# Altium PCB PCB1.PcbDoc
Units mm, origin at the board's own origin, x right, y up, seen from the top; angles counter-clockwise.
Board outline 112.01 x 64.26 mm, 2 copper layers (Top Layer, Bottom Layer); 66 components, 35 nets, 197 pads, 28 vias.
Unrouted connection lines stored in the file: 61.
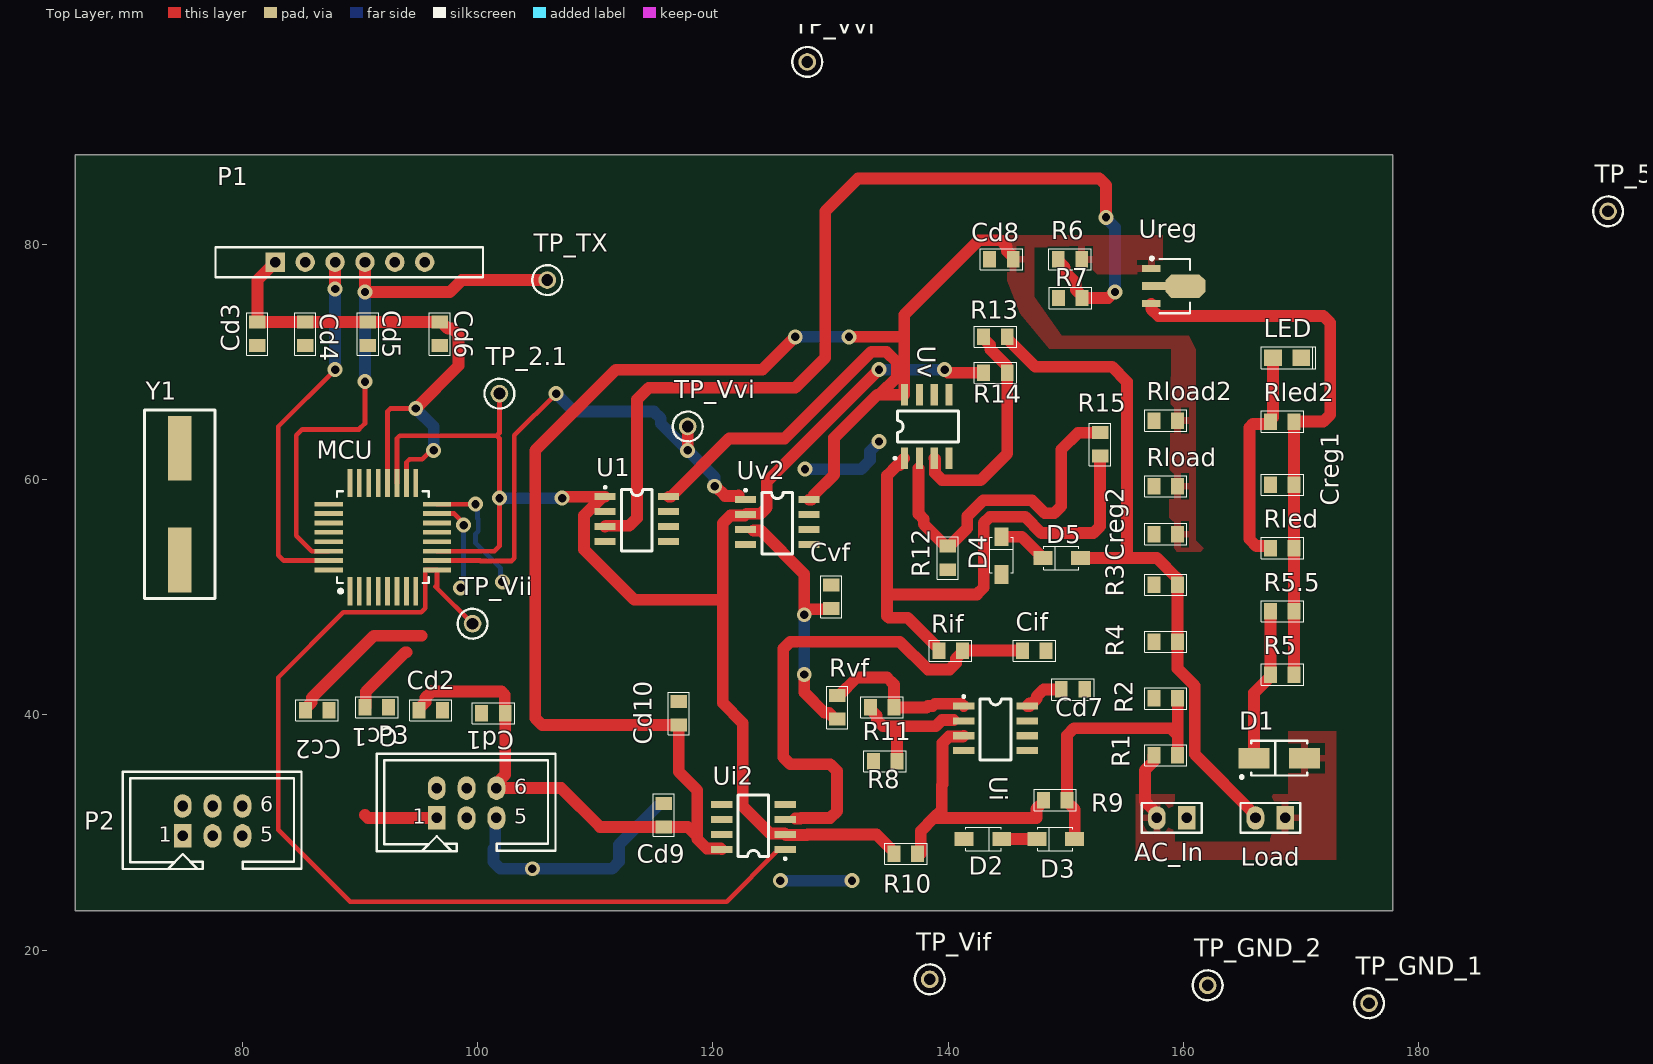
[diagram p0: Top Layer view]
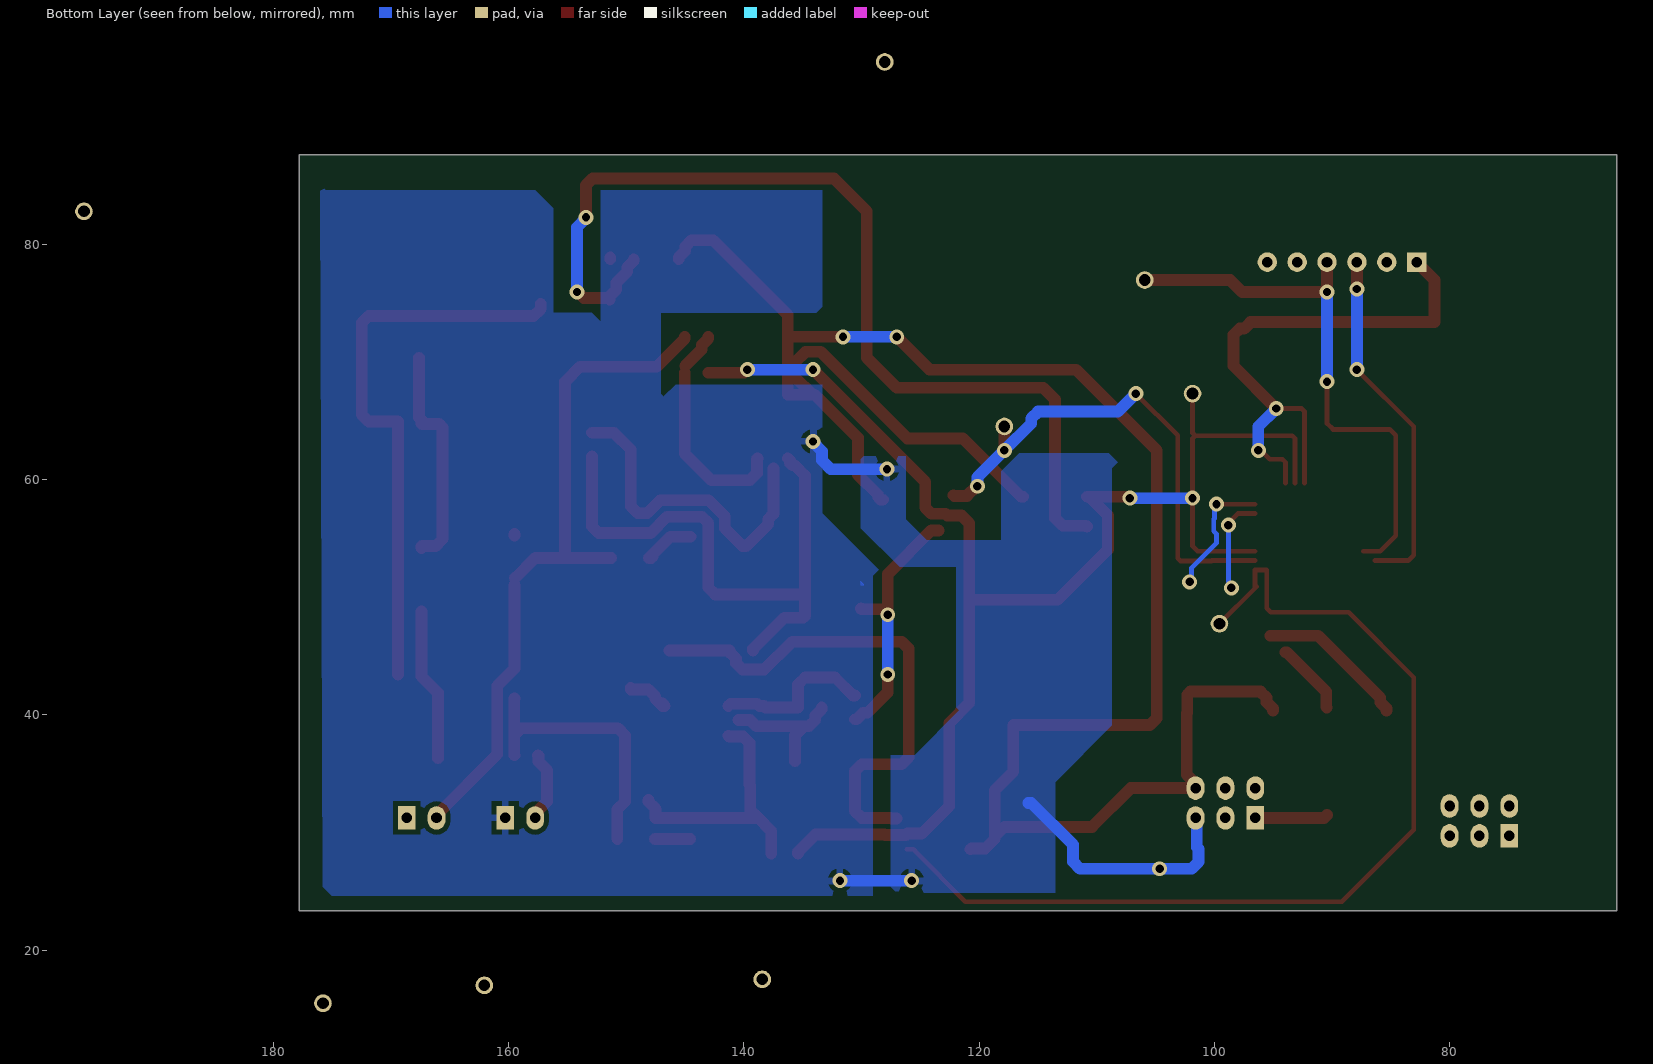
[diagram p1: Bottom Layer view, seen from below]

## Layer stack, top to bottom
Top Solder: solder mask 0.0102, Solder Resist, Dk 3.5
Top Layer: signal copper 0.0356
Dielectric 1: dielectric 0.32, FR-4, Dk 4.8
Bottom Layer: signal copper 0.0356
Bottom Solder: solder mask 0.0102, Solder Resist, Dk 3.5

## Board outline
65.786,23.368 177.8,23.368 177.8,87.63 65.786,87.63

## Design rules (kind name [scope] priority, off if disabled: settings)
Clearance [All] p1: gap=0.4 ignorepadtopadclearanceinfootprint=FALSE
Height [All] p1: minheight=0 maxheight=20 prefheight=12.7
HoleSize [All] p1: absolutevalues=TRUE maxlimit=10 minlimit=0.4 maxpercent=80.000 minpercent=20.000
PolygonConnect [All] p1: connectstyle=Relief reliefconductorwidth=0.6 reliefentries=4 polygonreliefangle="90 Angle" airgapwidth=0.4
RoutingVias [All] p1: holewidth=0.711 width=1.27 viastyle="Through Hole" minholewidth=0.711 minwidth=1.27 maxholewidth=0.711 maxwidth=1.27
SilkToSilkClearance [All] p1: silktosilkclearance=0.1
SilkToSolderMaskClearance [IsPad] p1: minsilkscreentomaskgap=0.1 clearancetoexposedcopper=TRUE
SolderMaskExpansion [All] p1: expansion=0.102 istentingtop=FALSE
SupplyNets "Schematic Supply Nets_26" [InNet('Vdc')] p1: voltage=0.000
SupplyNets "Schematic Supply Nets_25" [InNet('OC2B')] p2: voltage=0.000
SupplyNets "Schematic Supply Nets_24" [InNet('OC3B')] p3: voltage=0.000
SupplyNets "Schematic Supply Nets_23" [InNet('Vsensp')] p4: voltage=0.000
SupplyNets "Schematic Supply Nets_22" [InNet('RST')] p5: voltage=0.000
SupplyNets "Schematic Supply Nets_21" [InNet('Vvfilter')] p6: voltage=0.000
SupplyNets "Schematic Supply Nets_20" [InNet('Imeas')] p7: voltage=0.000
SupplyNets "Schematic Supply Nets_19" [InNet('Vifilter')] p8: voltage=0.000
SupplyNets "Schematic Supply Nets_18" [InNet('SDA')] p9: voltage=0.000
SupplyNets "Schematic Supply Nets_17" [InNet('Offset')] p10: voltage=0.000
SupplyNets "Schematic Supply Nets_16" [InNet('VCC')] p11: voltage=0.000
SupplyNets "Schematic Supply Nets_15" [InNet('MOSI')] p12: voltage=0.000
SupplyNets "Schematic Supply Nets_14" [InNet('RX')] p13: voltage=0.000
SupplyNets "Schematic Supply Nets_13" [InNet('GND')] p14: voltage=0.000
SupplyNets "Schematic Supply Nets_12" [InNet('2.1V')] p15: voltage=0.000
SupplyNets "Schematic Supply Nets_11" [InNet('5V')] p16: voltage=0.000
SupplyNets "Schematic Supply Nets_10" [InNet('X2')] p17: voltage=0.000
SupplyNets "Schematic Supply Nets_9" [InNet('SCK')] p18: voltage=0.000
SupplyNets "Schematic Supply Nets_8" [InNet('Vac')] p19: voltage=0.000
SupplyNets "Schematic Supply Nets_7" [InNet('Vmeas')] p20: voltage=0.000
SupplyNets "Schematic Supply Nets_6" [InNet('Vvinterrupt')] p21: voltage=0.000
SupplyNets "Schematic Supply Nets_5" [InNet('SCL')] p22: voltage=0.000
SupplyNets "Schematic Supply Nets_4" [InNet('Viinterrupt')] p23: voltage=0.000
SupplyNets "Schematic Supply Nets_3" [InNet('X1')] p24: voltage=0.000
SupplyNets "Schematic Supply Nets_2" [InNet('TX')] p25: voltage=0.000
SupplyNets "Schematic Supply Nets_1" [InNet('MISO')] p26: voltage=0.000
SupplyNets "Schematic Supply Nets" [InNet('Isensp')] p27: voltage=0.000
Width [All] p1: maxlimit=10 minlimit=0.4 preferedwidth=0.6
26 further rules are at their usual default settings.

## Components (designator, comment, footprint, x,y, rotation, side; value= is the part's Value field where it differs from the comment)
AC_In "Header 2" ece-HDR1X2 160.274,31.242 r180 top
Cc1 "*12n" "0805 CAP" 91.44,40.64 r0 top
Cc2 "*12n" "0805 CAP" 86.36,40.386 r0 top
Cd1 "*100n" "0805 CAP" 101.346,40.132 r180 top
Cd2 "*100n" "0805 CAP" 96.012,40.386 r0 top
Cd3 "*100n" "0805 CAP" 81.28,72.39 r270 top
Cd4 "*100n" "0805 CAP" 85.344,72.39 r270 top
Cd5 "*100n" "0805 CAP" 90.678,72.39 r270 top
Cd6 "*100n" "0805 CAP" 96.774,72.39 r270 top
Cd7 "*100n" "0805 CAP" 150.606,42.164 r0 top
Cd8 "*100n" "0805 CAP" 144.526,78.74 r180 top
Cd9 "*100n" "0805 CAP" 115.824,31.48 r90 top
Cd10 "*100n" "0805 CAP" 117.094,40.132 r90 top
Cif "*10n" "0805 CAP" 147.32,45.466 r0 top
Creg1 "*47µ" "0805 CAP" 168.402,59.558 r180 top
Creg2 "*10µ" "0805 CAP" 158.496,55.372 r180 top
Cvf "*10n" "0805 CAP" 130.048,50.038 r90 top
D1 "1N4148" DO214-MFG 168.148,36.322 r0 top
D2 "BZT52H-B4V7" SOD123 143.002,29.464 r0 top
D3 "BZT52H-B4V7" SOD123 149.098,29.464 r180 top
D4 "BZT52H-B4V7" SOD123 144.526,53.594 r90 top
D5 "BZT52H-B4V7" SOD123 149.606,53.34 r180 top
LED "LTST-C170KGKT" "0805 LED" 168.802,70.358 r0 top
Load "Header 2" ece-HDR1X2 168.656,31.242 r180 top
MCU "ATmega328PB MCU" "32 - TQFP" 91.948,55.118 r90 top
P1 "BLE Module Header" HM10_HDR1X6 82.804,78.486 r0 top
P2 "Header 3X2" ECE-BHDR2X3 74.93,29.718 r0 top
P3 "Header 3X2" ECE-BHDR2X3 96.52,31.242 r0 top
R1 "*100k" "0805 RES" 158.496,36.576 r180 top
R2 "*1k2" "0805 RES" 158.496,41.402 r0 top
R3 "*1" "0805 RES" 158.496,51.054 r0 top
R4 "*1" "0805 RES" 158.496,46.228 r0 top
R5 "*66" "0805 RES" 168.402,43.434 r0 top
R5.5 "*66" "0805 RES" 168.402,48.809 r0 top
R6 "*470k" "0805 RES" 150.352,78.74 r0 top
R7 "*340k" "0805 RES" 150.384,75.438 r0 top
R8 "*" "0805 RES" 134.636,36.068 r0 top
R9 "*" "0805 RES" 149.098,32.766 r180 top
R10 "*" "0805 RES" 136.398,28.194 r0 top
R11 "*" "0805 RES" 134.382,40.64 r0 top
R12 "*" "0805 RES" 139.954,53.34 r90 top
R13 "*" "0805 RES" 144.018,72.136 r180 top
R14 "*" "0805 RES" 144.018,69.088 r0 top
R15 "*" "0805 RES" 152.908,62.992 r270 top
Rif "*15k" "0805 RES" 140.208,45.466 r0 top
Rled "*1200" "0805 RES" 168.402,54.184 r180 top
Rled2 "*1200" "0805 RES" 168.402,64.933 r180 top
Rload "*200" "0805 RES" 158.496,59.436 r0 top
Rload2 "*200" "0805 RES" 158.496,65.024 r0 top
Rvf "*15k" "0805 RES" 130.556,40.64 r270 top
TP_2.1 "5003" TP_TH 101.854,67.31 r90 top
TP_5V "5003" TP_TH 196.088,82.804 r90 top
TP_GND_1 "5003" TP_TH 175.768,15.494 r90 top
TP_GND_2 "5003" TP_TH 162.052,17.018 r90 top
TP_TX "5003" TP_TH 105.918,76.962 r90 top
TP_Vif "5003" TP_TH 138.43,17.526 r90 top
TP_Vii "5003" TP_TH 99.568,47.752 r90 top
TP_Vvf "5003" TP_TH 128.016,95.504 r90 top
TP_Vvi "5003" TP_TH 117.856,64.516 r90 top
U1 "LM358" "SO - 8" 113.538,56.642 r0 top
Ui "LM358" "SO - 8" 144.018,38.862 r0 top
Ui2 "LM358" "SO - 8" 123.444,30.48 r180 top
Ureg "L78L05" SOT-89 159.258,76.454 r0 top
Uv "LM358" "SO - 8" 138.176,64.516 r90 top
Uv2 "LM358" "SO - 8" 125.476,56.388 r0 top
Y1 "SMT-XTAL 16MHz" HC49-US 74.676,57.912 r270 top

## Footprints (in the part's own frame and the unit in brackets; to place one, negate y for a bottom-side part, rotate by r counter-clockwise, add the part's x,y. Pads: shape width x height; smd on the part's side, far side on the other; paste and mask are expansions set on the pad)
"32 - TQFP" [mm]
  rect 2.4x0.4 smd: 1(-4.6,2.8) 2(-4.6,2) 3(-4.6,1.2) 4(-4.6,0.4) 5(-4.6,-0.4) 6(-4.6,-1.2) 7(-4.6,-2) 8(-4.6,-2.8) 17(4.6,-2.8) 18(4.6,-2) 19(4.6,-1.2) 20(4.6,-0.4) 21(4.6,0.4) 22(4.6,1.2) 23(4.6,2) 24(4.6,2.8)
  rect 0.4x2.4 smd: 9(-2.8,-4.6) 10(-2,-4.6) 11(-1.2,-4.6) 12(-0.4,-4.6) 13(0.4,-4.6) 14(1.2,-4.6) 15(2,-4.6) 16(2.8,-4.6) 25(2.8,4.6) 26(2,4.6) 27(1.2,4.6) 28(0.4,4.6) 29(-0.4,4.6) 30(-1.2,4.6) 31(-2,4.6) 32(-2.8,4.6)
  silkscreen extent -4.74,-3.9 3.9,3.9, body extent -4.5,-4.5 4.5,4.5, height 1.3
"0805 CAP" [mm] "http://www.digikey.co.nz/Web%20Export/Supplier%20Content/Vishay_8026/PDF/VishayBeyschlag_SolderPad.pdf?redirected=1 with dimension G modified by +0.25mm"
  rect 1.1x1.4 smd: 1(-1,0) 2(1,0)
  silkscreen extent -1.8,-0.9 1.8,0.9, body extent -1.04,-0.66 1.04,0.66, height 0.61
"0805 LED" [mm] "RED AS AlGaAs SMD LED, Body; 2mm x 1.25 mm (LxW)"
  rect 1.5x1.4 smd: 1(-1.2,0) 2(1.2,0)
  silkscreen extent -2.2,-0.95 2.45,0.95, body extent -1,-0.63 1,0.63, height 1.1
"0805 RES" [mm] "http://www.digikey.co.nz/Web%20Export/Supplier%20Content/Vishay_8026/PDF/VishayBeyschlag_SolderPad.pdf?redirected=1 with dimension G modified by +0.25mm"
  rect 1.1x1.4 smd: 1(-1,0) 2(1,0)
  silkscreen extent -1.8,-0.9 1.8,0.9, body extent -1.04,-0.66 1.04,0.66, height 0.61
DO214-MFG [mm]
  rect 2.65x1.75 smd paste+0 mask+0: 1(2.15,0) 2(-2.15,0)
  silkscreen extent -3.32,-1.72 2.37,1.48, body extent -3.57,-1.58 3.57,1.58, height 0.25
ECE-BHDR2X3 [mm]
  rect 1.5x2 hole 0.9: 1(0,0)
  oval 1.5x2 hole 0.9 paste-2539.97: 2(0,2.54)
  oval 1.5x2 hole 0.9: 3(2.54,0) 4(2.54,2.54) 5(5.08,0) 6(5.08,2.54)
  silkscreen extent -5.1,-2.82 10.1,5.45
ece-HDR1X2 [mm] "Header 2 way"
  rect 1.5x2 hole 0.9: 1(0,0)
  oval 1.5x2 hole 0.9: 2(2.54,0)
  silkscreen extent -1.27,-1.27 3.81,1.27
HC49-US [mm] "20Mhz Crystal"
  rect 5.5x2 smd: 1(-4.75,0) 2(4.75,0)
  silkscreen extent -8,-3 8,3, body extent -4.77,-2.4 4.79,2.4, height 3.8
HM10_HDR1X6 [mil] "Connector; Header; 6 Position"
  rect 65x65 hole 35.43: 1(0,0)
  round 65 hole 35.43: 2(100,0) 3(200,0) 4(300,0) 5(400,0) 6(500,0)
  silkscreen extent -200,-50 695,50, body extent -142,-39 571,228, height 1843
"SO - 8" [mm]
  rect 1.8x0.6 smd: 1(-2.7,1.905) 2(-2.7,0.635) 3(-2.7,-0.635) 4(-2.7,-1.905) 5(2.7,-1.905) 6(2.7,-0.635) 7(2.7,0.635) 8(2.7,1.905)
  silkscreen extent -2.8,-2.7 1.3,2.8, body extent -3.1,-2.5 3.1,2.5, height 1.8
SOD123 [mm] "SOD-123; 2 Leads; Body 2.7 x 1.6 mm, (LxW)"
  rect 1.6x1.2 smd: 1(-1.65,0) 2(1.55,0)
  silkscreen extent -1.5,-1 1.5,1, body extent -1.8,-0.86 1.8,0.86, height 1.21
SOT-89 [mm] "SOT89, 3-Leads, Body 4.5x2.4 mm, Pitch 1.5mm, Lead Span 4.1mm, IPC Low Density"
  rect 1.6x0.6 smd: 1(-2,1.5) 3(-2,-1.5)
  rect 2x0.7 smd: 2(-1.8,0)
  oct 3.4x2 smd: 2(0.9,0)
  silkscreen extent -2.07,-2.3 1.3,2.47, body extent -2.25,-2.29 2,2.29, height 1.6
TP_TH [mm] "Test Point, Through Hole, Dia 2.54mm"
  round 1.5 hole 1: 1(0,0)
  silkscreen extent -1.27,-1.27 1.27,1.27, body extent -1.27,-1.27 1.27,1.27, height 4.57

## Part data
AC_In Load: "Header, 2-Pin", LatestRevisionDate=17-Jul-2002, LatestRevisionNote="Re-released for DXP Platform.", Publisher="Altium Limited"
Cc1 Cc2 Cd1 Cd2 Cd3 Cd4 Cd5 Cd6 Cd7 Cd8 Cd9 Cd10 Cif Creg1 Creg2 Cvf: library part CerCap_SMT_0805, "SMT ceramic capacitor 0805 size"
D1: library part ES1H_SMT_DO214, "1N4148 100V 200mA SOD-123 diode", Capacitance @ Vr, F="4pF @ 0V, 1MHz", Current - Average Rectified (Io)=200mA, Manufacturer="ON Semiconductor", Manufacturer Part Number=1N4148TR, Operating Temperature - Junction="-65°C ~ 175°C", Package / Case="DO-204AH, DO-35, Axial", Supplier Device Package=DO-35, Supplier Part Number 1=1N4148FSCT-ND, Base Part Number=1N4148, Category="Discrete Semiconductor Products", ComponentLink1Description=https://www.fairchildsemi.com/datasheets/1N/1N914.pdf, ComponentLink1URL=https://www.fairchildsemi.com/datasheets/1N/1N914.pdf, Diode Type=Standard, Mounting Type="Through Hole", Part Status=Active, Pricing 1="1=0.16, 10=0.109, 100=0.0592, 500=0.03648, 1000=0.02488 (NZD)", RoHS="RoHS Compliant", Speed="Small Signal =< 200mA (Io), Any Speed", Stock 1=1658049, Supplier 1=Digi-Key
D2 D3 D4 D5: library part Zener_SMT_SOD123, "SMT zener diode with SOD123 package", Manufacturer="Nexperia USA Inc.", Manufacturer Part Number=BZT52H-B4V7,115, Operating Temperature="-65°C ~ 150°C (TA)", Package / Case=SOD-123F, Supplier Part Number 1=1727-1611-1-ND, Tolerance=±2%, Category="Discrete Semiconductor Products", ComponentLink1Description=https://assets.nexperia.com/documents/data-sheet/BZT52H_SER.pdf, ComponentLink1URL=https://assets.nexperia.com/documents/data-sheet/BZT52H_SER.pdf, Mounting Type="Surface Mount", Packaging="Cut Tape (CT)", Part Status=Active, Pricing 1="1=0.51, 10=0.408, 100=0.2164, 500=0.14232, 1000=0.09678 (NZD)", RoHS="RoHS Compliant", Stock 1=0, Supplier 1=Digi-Key, Supplier Device Package=SOD-123F
LED: library part LED_SMT_0805, "SMT LED 0805 size", Color=Green, Current - Test=20mA, Lens Color=Colorless, Manufacturer="Lite-On Inc.", Millicandela Rating=35mcd, Package / Case="0805 (2012 Metric)", Supplier Part Number 1=160-1414-1-ND, Voltage - Forward (Vf) (Typ)=2V, Category=Optoelectronics, ComponentLink1Description=http://optoelectronics.liteon.com/upload/download/DS22-2000-073/LTST-C170KGKT.pdf, ComponentLink1URL=http://optoelectronics.liteon.com/upload/download/DS22-2000-073/LTST-C170KGKT.pdf, Features=-, Height (Max)=1.10mm, Lens Style/Size="Rectangle with Flat Top, 1.40mm x 1.25mm", Lens Transparency=Clear, Manufacturer Part Number=LTST-C170KGKT, Mounting Type="Surface Mount", Packaging="Cut Tape (CT)", Part Status=Active, Pricing 1="1=0.62, 10=0.459, 25=0.338, 100=0.2415, 250=0.16416, 500=0.14486, 1000=0.11347 (NZD)", RoHS="RoHS Compliant", Size / Dimension="2.00mm L x 1.25mm W", Stock 1=503069, Supplier 1=Digi-Key, Viewing Angle=130°, Wavelength - Dominant=571nm, Wavelength - Peak=574nm
MCU: library part ATmega328PB_SMT_TQFP32, "IC MCU 8BIT 32KB FLASH 32TQFP", Manufacturer=Atmel, Manufacturer Part Number=ATMEGA328PB-AN, Operating Temperature="-40°C ~ 105°C (TA)", Package / Case=32-TQFP, Supplier Device Package="32-TQFP (7x7)", Supplier Part Number 1=ATMEGA328PB-AN-ND, Voltage - Supply (Vcc/Vdd)="1.8 V ~ 5.5 V", Category="Integrated Circuits (ICs)", ComponentLink1Description=http://www.atmel.com/images/atmel-42397-8-bit-avr-microcontroller-atmega328pb_datasheet.pdf, ComponentLink1URL=http://www.atmel.com/images/atmel-42397-8-bit-avr-microcontroller-atmega328pb_datasheet.pdf, Connectivity="I²C, SPI, UART/USART", Core Processor=AVR, Core Size=8-Bit, Data Converters="A/D 8x10b", EEPROM Size="1K x 8", Number of I/O=27, Oscillator Type=Internal, Packaging=Tray, Part Status=Active, Peripherals="Brown-out Detect/Reset, POR, PWM, WDT", Pricing 1="1=2.74, 10=2.448, 25=2.2032, 100=2.0074, 250=1.81152, 500=1.62548, 1000=1.37088 (USD)", Program Memory Size="32KB (16K x 16)", Program Memory Type=FLASH, RAM Size="2K x 8", RoHS="RoHS Compliant", Speed=20MHz, Stock 1=366, Supplier 1=Digi-Key
P1: library part BLEModule_TH, "2.54mm pitch 6-pin header for BLE module", LatestRevisionDate=17-Jul-2002, LatestRevisionNote="Re-released for DXP Platform.", Publisher="Altium Limited"
R1 R2 R3 R4 R5 R5.5 R6 R7 R8 R9 R10 R11 R12 R13 R14 R15 Rif Rled Rled2 Rload Rload2 Rvf: library part Res_SMT_0805, "0805 resistor", ComponentLink1Description=https://nz.mouser.com/datasheet/2/315/AOA0000C304-1149620.pdf, LatestRevisionDate=17-Jul-2002, LatestRevisionNote="Re-released for DXP Platform.", PackageReference=AXIAL-0.4, Published=8-Jun-2000, Publisher="Altium Limited"
TP_2.1 TP_5V TP_GND_1 TP_GND_2 TP_TX TP_Vif TP_Vii TP_Vvf TP_Vvi: library part TestPoint, "Test Point, Orange, 1-Pin THD, RoHS", Forward Current="3 A", Forward Voltage="1.08 V", Max Operating Temperature="150 degC", Max Surge Current="80 A", Min Operating Temperature="-65 degC", Package Quantity=500, Peak Reverse Current="600 uA", ComponentLink1Description="Manufacturer URL", ComponentLink1URL=http://www.keyelco.com/, ComponentLink2Description=Datasheet, ComponentLink2URL=http://keyelco.com/userAssets/file/M65p56.pdf, DatasheetVersion=Jun-15, Diameter="5.3 mm", Height="0.25 inch", Length="9.5 mm", Mount="Through Hole", PackageDescription="1-Pin Through Hole Device, Dia 2.54 mm", PackageReference=5003, Packaging=Bulk, Pins=2, Radiation Hardening=No, REACH SVHC="No SVHC", RoHSCompliant=true, Weight="0.01 lb", Width="0.25 inch"
U1 Ui Ui2 Uv Uv2: library part LM358_SMT_SOIC8, "IC OPAMP 8SOIC", Supplier Part Number 1=296-1014-1-ND, ComponentLink1Description=http://www.ti.com/lit/ds/symlink/tlc080a.pdf, ComponentLink1URL=http://www.ti.com/lit/ds/symlink/tlc080a.pdf, Supplier 1=Digi-Key
Ureg: library part L78L05_SMT_SOT89, "LDO Voltage Regulator 5V", Supplier Part Number 1=497-1181-1-ND, ComponentLink1Description=http://www.st.com/content/ccc/resource/technical/document/datasheet/99/3b/7d/91/91/51/4b/be/CD00000544.pdf/files/CD00000544.pdf/jcr:content/translations/en.CD00000544.pdf, ComponentLink1URL=http://www.st.com/content/ccc/resource/technical/document/datasheet/99/3b/7d/91/91/51/4b/be/CD00000544.pdf/files/CD00000544.pdf/jcr:content/translations/en.CD00000544.pdf, Supplier 1=Digi-Key
Y1: library part TXC9C-16_XTAL_SMT, "9C-16.000MAAJ-T crystal 16.0000MHZ 18PF SMD", Frequency Stability=±30ppm, Load Capacitance=18pF, Manufacturer="TXC CORPORATION", Manufacturer Part Number=9C-16.000MAAJ-T, Operating Mode=Fundamental, Operating Temperature="-20°C ~ 70°C", Package / Case=HC-49/US, Ratings=-, Supplier Part Number 1=887-1059-1-ND, Category="Crystals, Oscillators, Resonators", ComponentLink1Description=http://www.txccorp.com/download/products/quartz_crystals/2015TXC_9C_32.pdf, ComponentLink1URL=http://www.txccorp.com/download/products/quartz_crystals/2015TXC_9C_32.pdf, Frequency Tolerance=±30ppm, Height - Seated (Max)="0.161\" (4.10mm)", Mounting Type="Surface Mount", Packaging="Cut Tape (CT)", Part Status=Active, Pricing 1="1=0.75, 10=0.628, 50=0.5656, 100=0.5026, 500=0.47744 (NZD)", RoHS="RoHS Compliant", Size / Dimension="0.449\" L x 0.189\" W (11.40mm x 4.80mm)", Stock 1=11514, Supplier 1=Digi-Key, Type="MHz Crystal"

## Via types
v1: diameter 1.27, hole 0.711, Top Layer to Bottom Layer, 28 vias

## Nets (pads, with @x,y where several pads share a name; then routed paths per layer and width w, separated by ;. In a path a pad name is that pad's centre, name@x,y a point inside that pad or via, vN(x,y) a via of type N, cw(c..) or ccw(c..) an arc to the next point about the centre after c; other vN are vias at no path point)
2.1V: MCU.11 MCU.19 R10.1 R14.1 TP_2.1.1 U1.1 U1.2 Ui2.2 Uv2.2 | length 127.1
  Top Layer w0.4: MCU.19 93.148,63.5 93.382,63.734 101.62,63.734 ; MCU.11 101.433,53.918 101.854,54.339 v1(101.854,58.42) 101.854,63.5 101.62,63.734 ; TP_2.1.1 101.854,63.969 101.62,63.734
  Top Layer w1: v1(107.188,58.42) 107.315,58.547 U1.1@110.638,58.547 ; U1.1 U1.1@110.638,58.547 ; v1(134.112,69.342) 124.576,59.806 124.576,57.62 124.049,57.093 122.846,57.093 Uv2.2 122.706,56.953 121.503,56.953 120.834,56.284 120.834,49.784 ; R10.1 135.398,28.344 133.897,29.845 128.057,29.845 127.997,29.785 126.204,29.785 Ui2.2 126.074,29.915 124.871,29.915 122.544,32.242 122.544,39.307 120.834,41.017 120.834,49.784 ; v1(139.7,69.342) 139.954,69.088 R14.1 ; U1.1@110.638,58.547 109.038,56.947 109.038,54.064 113.318,49.784 120.834,49.784
  Bottom Layer w1: v1(101.854,58.42) v1(107.188,58.42) ; v1(134.112,69.342) v1(139.7,69.342)
5V: Cd1.1 Cd2.1 Cd3.1 Cd4.1 Cd5.1 Cd6.1 Cd7.1 Cd8.1 Cd9.1 Cd10.1 Creg2.1 MCU.4 MCU.18 MCU.20 P1.1 P2.2 P3.6 R6.2 Rload2.2 Rload.2 TP_5V.1 U1.8 Ui2.8 Ui.8 Ureg.1 Uv2.8 Uv.8 | length 233.2
  Top Layer w0.4: MCU.20 92.348,65.806 92.582,66.04 v1(94.742,66.04) ; MCU.18 93.948,61.456 94.214,61.722 95.281,61.722 96.043,62.484 v1(96.266,62.484)
  Top Layer w1: P1.1 81.28,76.962 Cd3.1 Cd4.1 Cd5.1 Cd6.1 96.924,73.39 97.474,72.84 97.847,72.84 98.374,72.313 98.374,69.672 v1(94.742,66.04) ; Cd2.1 95.012,40.536 95.562,41.086 95.562,41.459 96.089,41.986 102.03,41.986 102.296,41.72 102.296,40.182 Cd1.1 102.346,34.913 101.6,34.167 P3.6 107.101,33.782 110.403,30.48 Cd9.1 117.856,30.48 118.664,29.672 ; U1.8 116.438,58.547 121.391,63.5 126.099,63.5 133.476,70.877 134.748,70.877 135.647,69.978 135.647,68.706 134.157,67.216 133.966,67.216 ; Ui2.8 120.674,28.645 119.471,28.645 118.664,29.453 118.664,29.672 ; v1(127,72.136) 124.206,69.342 111.76,69.342 104.902,62.484 104.902,39.718 105.488,39.132 Cd10.1 117.094,35.162 118.664,33.592 118.664,29.672 ; Uv2.8 128.376,58.293 128.576,58.493 128.576,58.693 130.302,60.419 130.302,63.552 133.966,67.216 ; v1(131.572,72.136) 136.271,72.136 ; Cd8.1 145.526,78.89 144.976,79.44 144.976,79.813 144.449,80.34 142.603,80.34 136.271,74.008 136.271,72.136 ; Ui.8@146.918,40.967 Ui.8 146.918,40.767 147.529,41.378 147.529,41.578 148.115,42.164 Cd7.1 Cd7.1@149.606,42.314 ; R6.2 R6.2@151.352,78.89 ; Creg2.1@159.496,55.222 Creg2.1 ; 133.966,67.216 Uv.8 136.271,72.136
  Bottom Layer w1: v1(94.742,66.04) 96.266,64.516 v1(96.266,62.484) ; v1(127,72.136) v1(131.572,72.136)
GND: AC_In.1 Cc1.2 Cc2.2 Cd1.2 Cd2.2 Cd3.2 Cd4.2 Cd5.2 Cd6.2 Cd7.2 Cd8.2 Cd9.2 Cd10.2 Cif.2 Creg1.2 Creg2.2 Cvf.2 D2.1 D4.1 LED.2 MCU.5 MCU.21 P1.2 P2.6 P3.5 R2.1 R3.1 R4.1 R7.1 R8.1 R12.1 Rload2.1 Rload.1 TP_GND_1.1 TP_GND_2.1 U1.4 Ui2.4 Ui.4 Ureg.2 Uv2.4 Uv.4 | length 35.6
  Bottom Layer w1: P3.5 101.504,31.146 101.504,28.761 101.346,28.603 101.346,27.51 101.932,26.924 v1(104.648,26.924) 111.428,26.924 112.014,27.51 112.014,28.956 115.57,32.512 115.824,32.512 ; v1(125.73,25.908) v1(131.826,25.908) ; v1(127.831,60.891) 132.602,60.891 133.353,61.642 133.353,62.414 134.112,63.173 v1(134.112,63.246)
Imeas: R15.2 Rif.1 Uv.1 | length 50.7
  Top Layer w1: Uv.1 136.071,61.616 136.071,61.416 135.871,61.216 135.671,61.216 134.796,60.341 134.796,50.292 ; Rif.1 139.208,45.616 136.564,48.26 134.952,48.26 134.796,48.416 134.796,50.292 ; R15.2 152.908,56.038 152.322,55.452 147.924,55.452 146.532,56.844 143.553,56.844 143.026,56.317 143.026,51.658 143.026,50.83 142.44,50.244 134.844,50.244 134.796,50.292
Isensp: D5.1 Load.2 R3.2 R4.2 R13.1 | length 58.3
  Top Layer w1: R13.1 145.018,71.986 147.408,69.596 153.924,69.596 155.194,68.326 155.194,53.34 ; D5.1 155.194,53.34 ; R3.2@159.446,51.627 157.733,53.34 155.194,53.34 ; R3.2 R4.2 159.496,43.925 160.946,42.475 160.946,36.662 166.116,31.492 Load.2
MISO: MCU.16 P2.1 | length 11
  Top Layer w0.4: MCU.16 99.816,57.918 v1(99.822,57.912)
  Bottom Layer w0.4: v1(99.822,57.912) 99.988,57.746 99.988,56.698 100.041,56.646 100.041,55.622 99.822,55.403 99.822,54.61 101.942,52.49 101.942,51.474 v1(102.108,51.308)
MOSI: MCU.15 P2.4 | length 8.2
  Top Layer w0.4: MCU.15 97.997,57.118 98.806,56.309 v1(98.806,56.134)
  Bottom Layer w0.4: v1(98.552,50.8) 98.552,51.054 98.806,51.308 v1(98.806,56.134)
NetD1_2: D1.2 R5.1 R5.5.1 | length 13.1
  Top Layer w1: D1.2 165.998,41.88 167.402,43.284 R5.1 R5.5.1
NetD2_2: D2.2 D3.2 | length 3
  Top Layer w1: D2.2 D3.2
NetD4_2: D4.2 D5.2 | length 4.4
  Top Layer w1: D4.2 146.252,55.144 147.756,53.64 147.756,53.44 147.856,53.34 D5.2
NetLED_1: LED.1 Rled2.2 Rled.2 | length 19.3
  Top Layer w1: Rled.2 167.402,54.306 167.352,54.356 166.194,54.356 165.608,54.942 165.608,64.438 165.903,64.733 167.352,64.733 167.402,64.783 Rled2.2 167.402,65.083 167.602,65.283 LED.1
NetR8_2: R8.2 R11.1 Ui.2 | length 11.6
  Top Layer w1: R11.1 133.382,40.49 133.932,39.94 133.932,39.567 134.459,39.04 134.864,39.04 ; R8.2 135.636,38.268 134.864,39.04 ; Ui.2@140.462,39.557 139.465,39.557 138.948,39.04 134.864,39.04
NetR9_2: R9.2 R10.2 Ui.3 | length 22.7
  Top Layer w1: R10.2@137.668,28.194 137.668,30.122 138.788,31.242 ; Ui.3 141.248,38.157 140.045,38.157 139.518,37.63 139.518,34.108 139.446,34.036 139.446,31.9 138.788,31.242 ; R9.2 148.098,32.616 147.496,32.014 147.496,31.242 138.788,31.242
NetR12_2: R12.2 R15.1 Uv.2 | length 29
  Top Layer w1: Uv.2@137.481,60.96 137.481,57.083 137.922,56.642 137.922,56.222 139.804,54.34 R12.2 140.104,54.34 141.626,55.862 141.626,56.897 142.973,58.244 147.112,58.244 148.206,57.15 149.02,57.15 149.606,57.736 149.606,62.561 151.037,63.992 R15.1
NetR13_2: R13.2 R14.2 Uv.3 | length 18.8
  Top Layer w1: Uv.3 138.881,61.746 138.881,60.543 139.48,59.944 142.748,59.944 145.018,62.214 R14.2 ; R13.2 143.018,71.986 143.568,71.436 143.568,71.063 R14.2@144.968,69.663
OC2B: MCU.1 P3.3
OC3B: MCU.32 P3.4
Offset: R6.1 R7.2 U1.3 | length 85
  Top Layer w1: U1.3 110.908,56.077 112.895,56.077 113.538,56.72 113.538,66.802 114.554,67.818 127,67.818 129.54,70.358 129.54,82.804 132.334,85.598 152.83,85.598 153.416,85.012 v1(153.416,82.296) ; R6.1 149.352,78.59 149.902,78.04 149.902,77.667 150.834,76.735 150.834,76.138 151.384,75.588 R7.2@151.384,75.288 ; R7.2@151.384,75.388 151.434,75.438 153.597,75.438 154.105,75.946 v1(154.178,75.946)
  Bottom Layer w1: v1(153.416,82.296) 153.416,82.223 154.178,81.461 v1(154.178,75.946)
RST: MCU.29 P2.5
RX: MCU.31 P1.3 | length 30.4
  Top Layer w0.4: MCU.31@86.36,53.118 83.514,53.118 83.058,53.574 83.058,64.516 v1(87.884,69.342)
  Top Layer w1: v1(87.884,76.2) P1.3
  Bottom Layer w1: v1(87.884,69.342) v1(87.884,76.2)
SCK: MCU.17 P2.3
SCL: MCU.28 P3.1 | length 6.2
  Top Layer w1: 90.424,31.496 90.678,31.242 P3.1
SDA: MCU.27 P3.2
TX: MCU.30 P1.4 TP_TX.1 | length 47.7
  Top Layer w0.4: MCU.30 85.899,53.918 84.582,55.235 84.582,63.754 85.09,64.262 89.916,64.262 90.424,64.77 v1(90.424,68.326)
  Top Layer w1: P1.4 v1(90.424,75.946) 97.632,75.946 98.648,76.962 TP_TX.1
  Bottom Layer w1: v1(90.424,68.326) v1(90.424,75.946)
Vac: AC_In.2 D1.1 Load.1 R1.2 | length 6.1
  Top Layer w1: R1.2 157.446,36.526 157.446,36.01 156.718,35.282 156.718,32.643 157.734,31.627 AC_In.2
VCC: MCU.25 MCU.26
Vdc: Creg1.1 R5.2 R5.5.2 Rled2.1 Rled.1 Ureg.3 | length 48.8
  Top Layer w1: Ureg.3 157.258,74.5 157.844,73.914 171.88,73.914 172.466,73.328 172.466,65.519 171.88,64.933 Rled2.1 Creg1.1 Rled.1 R5.5.2 R5.2
Vifilter: Cif.1 MCU.24 Rif.2 TP_Vif.1 Ui2.3 | length 43.8
  Top Layer w1: Ui2.3@127,31.185 127.417,31.185 127.477,31.245 129.97,31.245 130.556,31.831 130.556,35.228 129.97,35.814 126.57,35.814 125.984,36.4 125.984,45.642 126.57,46.228 135.89,46.228 138.252,43.866 140.131,43.866 140.658,44.393 140.658,44.766 141.208,45.316 Rif.2 ; Rif.2@141.462,45.466 Cif.1
Viinterrupt: MCU.9 TP_Vii.1 Ui2.1 | length 85.6
  Top Layer w0.4: 96.414,50.906 96.548,51.04 ; TP_Vii.1 96.548,50.772 96.548,51.04 ; Ui2.1 125.544,28.575 125.444,28.475 125.444,28.416 121.158,24.13 89.154,24.13 83.058,30.226 83.058,43.18 88.596,48.718 95.197,48.718 95.548,49.069 95.548,52.084 95.548,52.318 MCU.9 96.548,51.04
Vmeas: R11.2 Rvf.1 Ui.1 | length 13.8
  Top Layer w1: Rvf.1 130.706,41.64 132.246,43.18 134.796,43.18 135.382,42.594 R11.2 138.147,40.64 138.274,40.767 138.695,40.767 138.885,40.957 141.128,40.957 Ui.1
Vsensp: D3.1 R1.1 R2.2 R9.1 | length 23.8
  Top Layer w1: D3.1 150.748,31.966 150.098,32.616 R9.1 150.098,38.276 150.684,38.862 158.926,38.862 159.512,38.276 ; R1.1 159.512,36.592 159.512,38.276 ; R2.2 159.512,41.386 159.512,38.276
Vvfilter: Cvf.1 MCU.23 Rvf.2 TP_Vvf.1 Uv2.3 | length 21.4
  Top Layer w1: Uv2.3@123.444,55.683 124.049,55.683 127.762,51.97 v1(127.762,48.514) ; v1(127.762,43.434) 127.762,41.911 129.483,40.19 129.856,40.19 130.406,39.64 Rvf.2 ; 128.309,48.988 129.998,48.988 Cvf.1
  Bottom Layer w1: v1(127.762,43.434) v1(127.762,48.514)
Vvinterrupt: MCU.10 TP_Vvi.1 Uv2.1 | length 43.6
  Top Layer w0.4: MCU.10 100.203,53.118 100.235,53.086 102.89,53.086 103.124,53.32 103.124,63.754 v1(106.68,67.31)
  Top Layer w1: v1(117.856,62.484) TP_Vvi.1 ; v1(120.142,59.436) 120.215,59.436 121.034,58.617 122.117,58.617 122.174,58.674
  Bottom Layer w1: v1@106.934,67.056 108.204,65.786 114.984,65.786 115.57,65.2 115.57,64.77 v1(117.856,62.484) 120.142,60.198 v1(120.142,59.436)
X1: Cc1.1 MCU.7 Y1.1 | length 6.2
  Top Layer w1: Cc1.1 90.49,40.69 90.49,41.976 93.85,45.336 93.98,45.336
X2: Cc2.1 MCU.8 Y1.2 | length 12.8
  Top Layer w1: Cc2.1 85.36,40.536 85.91,41.086 85.91,41.459 91.187,46.736 95.25,46.736
pads on no net: MCU.2 MCU.3 MCU.6 MCU.12 MCU.13 MCU.14 MCU.22 P1.5 P1.6 U1.5 U1.6 U1.7 Ui2.5 Ui2.6 Ui2.7 Ui.5 Ui.6 Ui.7 Uv2.5 Uv2.6 Uv2.7 Uv.5 Uv.6 Uv.7

## Polygon pours and split planes (outlines as drawn)
5V on Top Layer "5V_L01_P022" (solid, pour order 22): 144.526,79.756 145.034,79.248 145.034,76.909 146.123,74.08 148.569,71.145 158.979,71.145 158.75,53.848 161.544,53.848 161.798,54.102 161.036,54.864 161.036,71.085 160.452,72.212 149.635,72.212 147.32,75.556 147.32,79.756 150.114,79.756 150.622,79.248 150.622,77.978 152.146,77.978 152.654,77.47 158.242,77.47 158.242,79.502 158.242,79.756 158.242,80.01 158.242,80.772 144.526,80.772
Vac on Top Layer "VAC_L01_P007" (solid, pour order 7): 155.956,33.274 159.258,33.274 159.258,29.21 167.386,29.21 167.386,33.274 168.91,33.274 168.91,38.608 172.974,38.608 172.974,27.686 155.956,27.686
GND on Bottom Layer "GND_L02_P025" (solid, pour order 25): 133.35,74.676 133.858,74.168 147.066,74.168 147.066,67.31 146.812,67.056 145.796,68.072 133.35,68.072 133.35,57.15 128.524,52.324 129.032,51.816 129.032,24.638 175.006,24.638 175.768,25.4 176.022,85.09 175.514,84.582 157.734,84.582 156.21,83.058 156.21,74.168 152.908,74.168 152.146,73.406 152.146,84.582 133.35,84.582
GND on Bottom Layer "GND_L02_P026" (solid, pour order 26): 116.586,62.23 118.11,60.706 118.11,54.864 124.46,54.864 126.238,56.642 126.238,61.976 129.794,61.976 130.048,61.722 130.048,55.88 126.746,52.578 121.92,52.578 121.92,40.64 121.666,40.386 125.476,36.576 127.508,36.576 127.508,25.4 127,24.892 113.538,24.892 113.538,34.29 108.712,39.116 108.712,60.96 108.204,61.468 108.966,62.23 109.22,62.23
no net on Bottom Layer "NONET_L02_P024" (solid, pour order 24): 129.921,51.181 130.048,51.181 130.048,51.054 129.794,51.054 130.048,51.308

## Text inside footprints (layer, text, board x,y; h text height)
P2: Top Overlay "1" at 72.898,29.21 h1.27; Top Overlay "5" at 81.534,29.21 h1.27; Top Overlay "6" at 81.534,31.75 h1.27
P3: Top Overlay "1" at 94.488,30.734 h1.27; Top Overlay "5" at 103.124,30.734 h1.27; Top Overlay "6" at 103.124,33.274 h1.27